# Altium PCB aboutlove.PcbDoc
Units mm, origin at the board's own origin, x right, y up, seen from the top; angles counter-clockwise.
Board outline 129.52 x 32.33 mm, 2 copper layers (Top Layer, Bottom Layer); 45 components, 100 nets, 325 pads, 150 vias.
Unrouted connection lines stored in the file: 1.
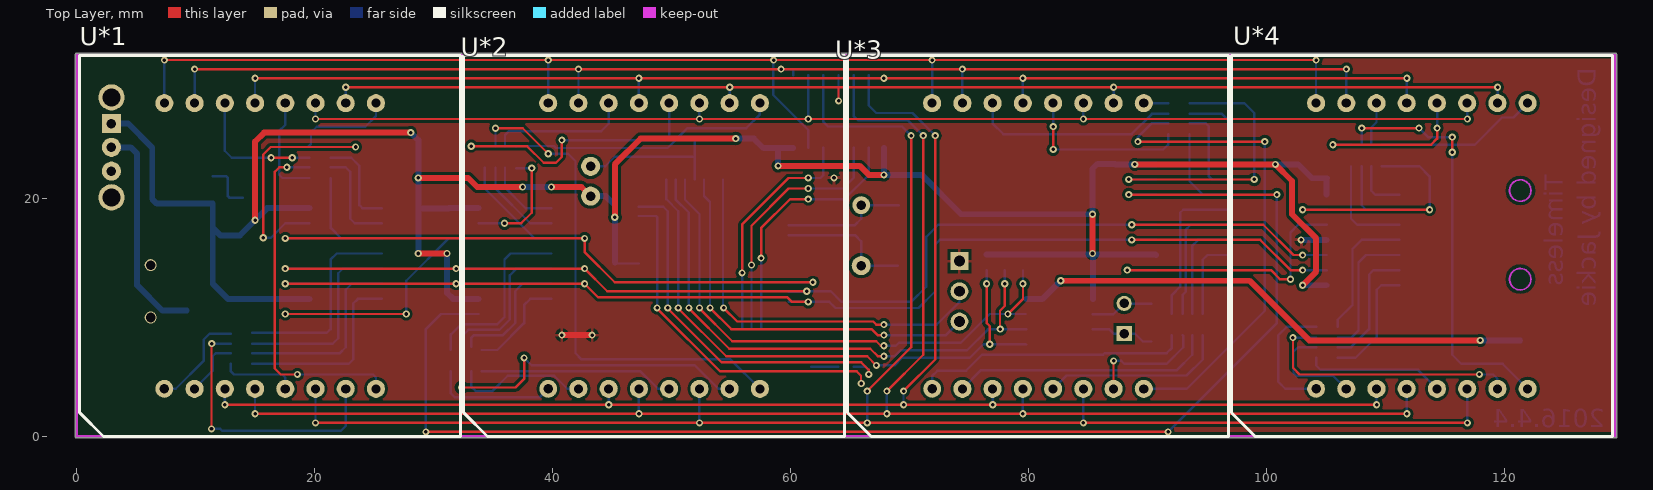
[diagram p0: Top Layer view]
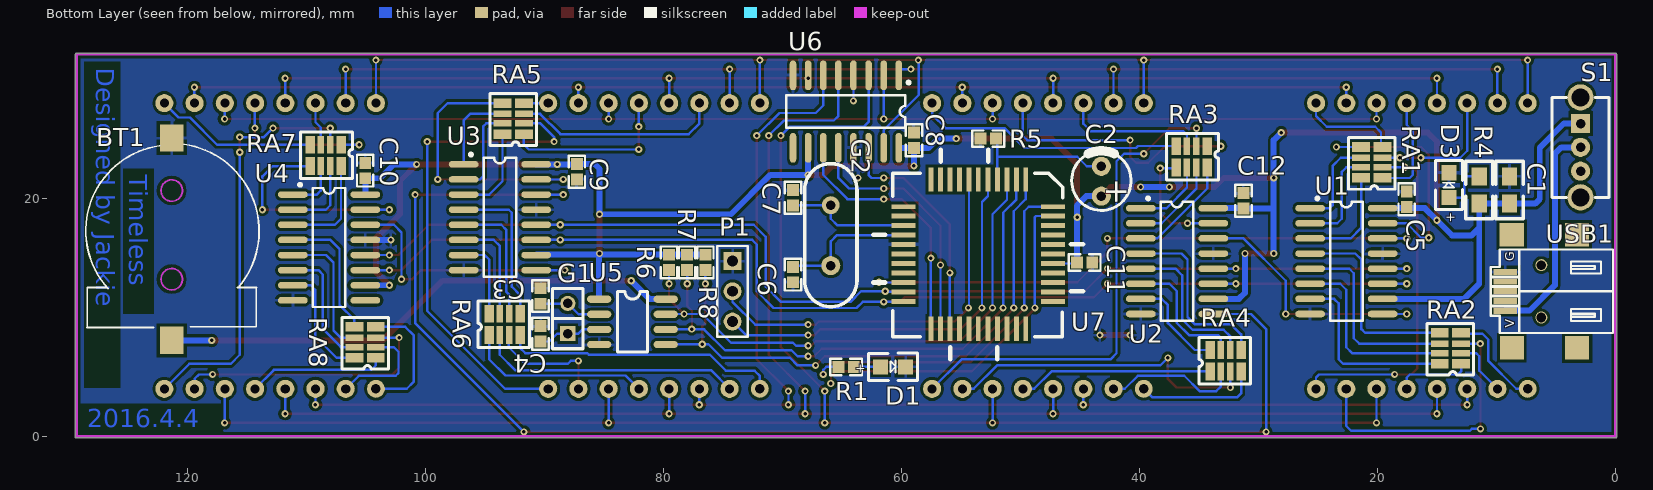
[diagram p1: Bottom Layer view, seen from below]

## Layer stack, top to bottom
Top Layer: signal copper 0.0356
Dielectric: dielectric 0.32, FR-4, Dk 4.8
Bottom Layer: signal copper 0.0356

## Board outline
-0.1,0.078 -0.1,32.1 cw(c0,32.1) 0,32.2 129.27,32.2 cw(c129.27,32.1) 129.37,32.1 129.37,0.078 cw(c129.27,0) 129.397,0 cw(c129.27,0) 129.27,-0.127 0,-0.127 cw(c0,0)

## Design rules (kind name [scope] priority, off if disabled: settings)
Clearance [All] p1: gap=0.254
PolygonConnect [All] p1: connectstyle=Relief reliefconductorwidth=0.254 reliefentries=4 polygonreliefangle="90 Angle"
RoutingVias [All] p1: holewidth=0.711 width=1.27 viastyle="Through Hole" minholewidth=0.711 minwidth=1.27 maxholewidth=0.711 maxwidth=1.27
SilkscreenOverComponentPads [All] p1: minsilkscreentomaskgap=0.254
SolderMaskExpansion [All] p1: expansion=0.102
Width [All] p1: maxlimit=1 minlimit=0.1 preferedwidth=0.2
27 further rules are at their usual default settings.

## Components (designator, comment, footprint, x,y, rotation, side; value= is the part's Value field where it differs from the comment)
BT1 "Battery" BAT-CR1220 121.285,13.208 r180 bottom
C1 "1uF" 0805 8.89,21.844 r270 bottom
C2 "10uF/16V" RB.1/.2A 43.18,20.193 r270 bottom
C3 "30pF" 0603_SMALL 90.297,12.446 r270 bottom
C4 "30pF" 0603_SMALL 90.297,9.271 r270 bottom
C5 "0.1uF" 0603_SMALL 17.526,20.574 r270 bottom
C6 "30pF" 0603_SMALL 69.088,12.954 r90 bottom
C7 "30pF" 0603_SMALL 69.088,20.701 r270 bottom
C8 "0.1uF" 0603_SMALL 58.928,25.527 r270 bottom
C9 "0.1uF" 0603_SMALL 87.249,21.59 r90 bottom
C10 "0.1uF" 0603_SMALL 105.029,22.987 r270 bottom
C11 "0.1uF" 0603_SMALL 43.942,14.605 r0 bottom
C12 "0.1uF" 0603_SMALL 31.242,20.447 r270 bottom
D1 "LED2" LED0805 61.722,5.842 r180 bottom
D3 "LED2" LED0805 13.97,20.066 r90 bottom
G1 "32768Hz" SIP2 88.011,8.636 r90 bottom
G2 "11.0592MHz" XTAL1_ARC 65.913,19.431 r270 bottom
P1 "Header 3" HDR1X3 74.168,14.732 r270 bottom
R1 "220R" 0603_SMALL 65.278,5.842 r180 bottom
R4 "10k" 0805 11.43,21.844 r270 bottom
R5 "10k" 0603_SMALL 53.34,25.019 r180 bottom
R6 "10k" 0603_SMALL 79.502,13.97 r90 bottom
R7 "10k" 0603_SMALL 77.978,13.97 r90 bottom
R8 "10k" 0603_SMALL 76.454,13.97 r90 bottom
RA1 "220R" NR4_L 19.558,21.717 r90 bottom
RA2 "220R" NR4_L 12.954,6.096 r90 bottom
RA3 "220R" NR4_L 34.29,24.384 r0 bottom
RA4 "220R" NR4_L 34.036,5.461 r180 bottom
RA5 "220R" NR4_L 91.694,25.4 r90 bottom
RA6 "220R" NR4_L 94.615,8.509 r180 bottom
RA7 "220R" NR4_L 107.061,24.511 r0 bottom
RA8 "220R" NR4_L 104.14,6.604 r90 bottom
S1 "SW1X3" SW1X3 2.921,26.289 r270 bottom
U1 "74HC595D" SOP16 22.606,14.732 r180 bottom
U2 "74HC595D" SOP16 36.83,14.732 r180 bottom
U3 "74HC595D" SOP16 93.726,18.415 r180 bottom
U4 "74HC595D" SOP16 108.077,15.875 r180 bottom
U5 "DS1302" SOP8 85.344,11.557 r180 bottom
U6 "74HC595D" SOP16 64.643,27.305 r270 bottom
U7 "STC12C5A16S2" TQFP44 49.53,21.59 r270 bottom
U*1 "点阵" 点阵 0.254,0 r0 top
U*2 "点阵" 点阵 32.508,0 r0 top
U*3 "点阵" 点阵 64.762,0 r0 top
U*4 "点阵" 点阵 97.016,0 r0 top
USB1 "USB" USB-MINI 5.08,12.192 r90 bottom

## Footprints (in the part's own frame and the unit in brackets; to place one, negate y for a bottom-side part, rotate by r counter-clockwise, add the part's x,y. Pads: shape width x height; smd on the part's side, far side on the other; paste and mask are expansions set on the pad)
0603_SMALL [mm]
  rect 1x1 smd: 1(0,0) 2(1.297,0)
  silkscreen extent -0.69,-0.69 1.99,0.69
0805 [mil]
  rect 60x50 smd: 1(0,0) 2(90,0)
  silkscreen extent -50,-45 140,45
BAT-CR1220 [mm]
  rect 2x2.3 smd: 1(0,-5.138) 2(0,11.862)
  Keep-Out Layer circle w0.15: c0,7.45 r0.9
  Keep-Out Layer circle w0.15: c0,0 r0.9
  silkscreen extent -7.22,-4.06 7.34,11.33
HDR1X3 [mm] "Connector; Header; 3 Position"
  rect 1.5x1.5 hole 0.9: 1(0,0)
  round 1.5 hole 0.9: 2(2.54,0) 3(5.08,0)
  silkscreen extent -1.27,-1.27 6.35,1.27
LED0805 [mm]
  rect 1.27x1.27 smd: 1(0,0) 2(2.09,0.005)
  silkscreen extent -1.01,-1.14 3.1,1.15
NR4_L [mm]
  rect 0.8x1.5 smd: 1(0,0) 4(2.6,0) 5(2.6,1.8) 8(0,1.8)
  rect 0.55x1.5 smd: 2(0.9,0) 3(1.7,0) 6(1.7,1.8) 7(0.9,1.8)
  silkscreen extent -0.95,-1.05 3.4,2.85
RB.1/.2A [mm]
  round 1.6 hole 0.8: 1(0,0) 2(-2.5,0)
  silkscreen extent -3.8,-2.5 1.2,2.5
SIP2 [mil]
  rect 50x50 hole 32: 1(0,0)
  round 50 hole 32: 2(100,0)
  silkscreen extent -50,-50 150,50
SOP8 [mil]
  oval 80x24 smd: 1(-1,-1) 2(-1,-51) 3(-1,-101) 4(-1,-151) 5(219,-151) 6(219,-101) 7(219,-51) 8(219,-1)
  silkscreen extent 59,-176 159,24
SOP16 [mm]
  oval 2.5x0.55 smd: 1(-3.035,4.445) 2(-3.035,3.175) 3(-3.035,1.905) 4(-3.035,0.635) 5(-3.035,-0.635) 6(-3.035,-1.905) 7(-3.035,-3.175) 8(-3.035,-4.445) 9(3.06,-4.445) 10(3.06,-3.175) 11(3.06,-1.905) 12(3.06,-0.635) 13(3.06,0.635) 14(3.06,1.905) 15(3.06,3.175) 16(3.06,4.445)
  silkscreen extent -2.55,-5 1.37,5.39
SW1X3 [mm]
  round 2.2 hole 1.5: 0(-2.2,0) 0(6.2,0)
  rect 1.6x1.6 hole 0.8: 1(0,0)
  round 1.6 hole 0.8: 2(2,0) 3(4,0)
  silkscreen extent -2.2,-2.4 6.2,2.4
TQFP44 [mil]
  rect 80x16 smd: 1(0,0) 2(0,-31) 3(0,-62) 4(0,-94) 5(0,-125) 6(0,-157) 7(0,-188) 8(0,-219) 9(0,-251) 10(0,-282) 11(0,-314) 23(494,-314) 24(494,-282) 25(494,-251) 26(494,-219) 27(494,-188) 28(494,-157) 29(494,-125) 30(494,-94) 31(494,-62) 32(494,-31) 33(494,0)
  rect 16x80 smd: 12(90,-404.32) 13(121,-404.32) 14(152,-404.32) 15(184,-404.32) 16(215,-404.32) 17(247,-404.32) 18(278,-404.32) 19(309,-404.32) 20(341,-404.32) 21(372,-404.32) 22(404,-404.32) 34(404,90.31) 35(372,90.31) 36(341,90.31) 37(309,90.31) 38(278,90.31) 39(247,90.32) 40(215,90.32) 41(184,90.32) 42(152,90.32) 43(121,90.32) 44(90,90.32)
  silkscreen extent -98,-504 594,189
USB-MINI [mm]
  rect 2x2 smd: 0(-4.746,-1.872) 0(-4.746,3.612)
  round 1 hole 0.8: 0(-2.2,1.128) 0(2.2,1.128)
  rect 2x2.032 smd: 0(4.746,-1.872) 0(4.746,3.628)
  rect 0.52x2 smd: 1(-1.626,4.166) 2(-0.813,4.166) 3(0,4.166) 4(0.813,4.166) 5(1.626,4.166)
  silkscreen extent -3.5,-4.87 3.5,5.38
XTAL1_ARC [mm]
  round 1.5 hole 0.8: 1(0,0)
  round 1.6 hole 0.8: 2(5.08,0)
  silkscreen extent -3.49,-2.2 8.53,2.2
点阵 [mil]
  round 59.06 hole 31.5: 1(279.92,157.48)
  round 60 hole 30: 2(379.92,157.48) 3(479.92,157.48) 4(579.92,157.48) 5(679.92,157.48) 6(779.92,157.48) 7(879.92,157.48) 8(979.92,157.48) 9(979.92,1102.36) 10(879.92,1102.36) 11(779.92,1102.36) 12(679.92,1102.36) 13(579.92,1102.36) 14(479.92,1102.36) 15(379.92,1102.36) 16(279.92,1102.36)
  silkscreen extent 0,0 1260,1260

## Part data
BT1: "Multicell Bat"
C1 C3 C4 C5 C6 C7 C8 C9 C10 C11 C12: library part Cap, "Capacitor"
C2: library part "Cap Pol2", "Polarized Capacitor (Axial)"
D1 D3: "Typical RED, GREEN, YELLOW, AMBER GaAs"
G1 G2: library part CRYSTAL, "Crystal"
P1: "Header, 3-Pin"
R1 R4 R5 R6 R7 R8: library part Res2, "Resistor"
RA1 RA2 RA3 RA4 RA5 RA6 RA7 RA8: library part NR4
U1 U2 U3 U4 U6: library part 74HC
U5: library part DS
U7: library part STC12C5A08S2
U*1 U*2 U*3 U*4: library part 点

## Via types
v1: diameter 0.6, hole 0.3, Top Layer to Bottom Layer, 150 vias

## Nets (pads, with @x,y where several pads share a name; then routed paths per layer and width w, separated by ;. In a path a pad name is that pad's centre, name@x,y a point inside that pad or via, vN(x,y) a via of type N, cw(c..) or ccw(c..) an arc to the next point about the centre after c; other vN are vias at no path point)
BAT: BT1.1 U5.8 | length 44.2
  Top Layer w0.5: v1(82.677,13.081) 98.546,13.081 103.557,8.07 v1(117.925,8.07)
  Bottom Layer w0.5: U5.8 81.128,11.532 v1(82.677,13.081) ; v1(117.925,8.07) BT1.1
GND: BT1.2 C1.1 C3.1 C4.1 C5.1 C6.1 C7.1 C8.1 C9.1 C10.1 C11.1 C12.1 D1.2 D3.2 P1.1 R5.1 U1.8 U1.13 U2.8 U2.13 U3.8 U3.13 U4.8 U4.13 U5.4 U6.8 U6.13 U7.16 USB1.5 | length 4.7
  Top Layer w0.5: v1(40.767,8.509) v1(43.307,8.509)
  Bottom Layer w0.5: v1(102.87,16.51) U4.13
  other v1: 63.627,21.717
NetC3_2: C3.2 G1.2 U5.2 | length 5.3
  Bottom Layer w0.2: U5.2 87.097,10.262 G1.2 88.038,11.149 C3.2
NetC4_2: C4.2 G1.1 U5.3 | length 5.3
  Bottom Layer w0.2: U5.3 86.766,8.992 87.122,8.636 G1.1 88.9,8.636 89.562,7.974 C4.2
NetD1_1: D1.1 R1.2 | length 2.3
  Bottom Layer w0.2: D1.1 R1.2
NetD3_1: D3.1 R4.1 | length 4.2
  Bottom Layer w0.2: R4.1 12.573,21.844 12.7,21.717 12.7,20.193 12.827,20.066 D3.1
NetP1_2: P1.2 U7.7 | length 32.9
  Top Layer w0.2: v1(54.356,10.795) 55.499,9.652 66.929,9.652 67.183,9.398 v1(67.818,9.398)
  Bottom Layer w0.2: v1@54.305,10.795 U7.7 ; v1(67.818,9.398) 72.263,9.398 74.168,11.303 P1.2
NetP1_3: P1.3 U7.5 | length 33.4
  Top Layer w0.2: v1(53.213,10.795) 54.991,9.017 66.783,9.017 67.291,8.509 v1(67.818,8.509)
  Bottom Layer w0.2: U7.5 52.705,20.193 53.213,19.685 v1(53.213,10.795) ; v1(67.818,8.509) 73.025,8.509 P1.3
NetRA1_1: RA1.1 U*1.12 | length 8.9
  Bottom Layer w0.2: U*1.12 17.524,26.164 17.01,25.65 17.01,21.979 17.272,21.717 RA1.1
NetRA1_2: RA1.2 U*1.8 | length 29.4
  Top Layer w0.2: v1(17.664,22.617) 17.029,22.617 16.637,22.225 16.637,5.715 17.145,5.207 v1(18.542,5.207)
  Bottom Layer w0.2: v1(17.664,22.617) RA1.2 ; v1(18.542,5.207) 24.892,5.207 25.144,4.955 U*1.8
NetRA1_3: RA1.3 U*1.14 | length 11.4
  Top Layer w0.2: v1(16.334,23.417) v1(18.112,23.417)
  Bottom Layer w0.2: U*1.14 12.444,24.005 13.032,23.417 v1(16.334,23.417) ; v1(18.112,23.417) RA1.3
NetRA1_4: RA1.4 U*1.9 | length 8.4
  Bottom Layer w0.2: RA1.4@19.431,24.317 19.685,24.571 19.685,25.527 20.174,26.016 24.238,26.016 25.144,26.922 U*1.9
NetRA1_5: RA1.5 U1.15 | length 21.5
  Top Layer w0.2: v1(15.68,16.696) 15.68,23.688 16.309,24.317 v1(23.435,24.317)
  Bottom Layer w0.2: v1(15.68,16.696) 16.315,16.696 17.526,17.907 U1.15 ; RA1.5 v1(23.435,24.317)
NetRA1_6: RA1.6 U1.1 | length 8
  Bottom Layer w0.2: RA1.6 23.065,23.417 23.749,22.733 23.749,19.431 24.003,19.177 U1.1
NetRA1_7: RA1.7 U1.2 | length 8.5
  Bottom Layer w0.2: RA1.7 22.595,22.617 22.987,22.225 22.987,18.288 23.368,17.907 U1.2
NetRA1_8: RA1.8 U1.3 | length 8.9
  Bottom Layer w0.2: RA1.8 21.358,17.504 22.225,16.637 U1.3
NetRA2_1: RA2.1 U*1.5 | length 6.4
  Bottom Layer w0.2: RA2.1 12.954,5.461 13.208,5.207 17.272,5.207 17.524,4.955 U*1.5
NetRA2_2: RA2.2 U*1.2 | length 5
  Bottom Layer w0.2: U*1.2 11.43,5.526 11.43,6.731 11.695,6.996 RA2.2
NetRA2_3: RA2.3 U*1.7 | length 23.4
  Top Layer w0.2: v1(11.328,0.635) 11.328,7.772 v1(11.352,7.796)
  Bottom Layer w0.2: v1(11.328,0.635) 12.065,0.635 12.219,0.481 22.198,0.481 22.604,0.887 U*1.7 ; v1(11.352,7.796) RA2.3
NetRA2_4: RA2.4 U*1.1 | length 8.6
  Bottom Layer w0.2: U*1.1 8.318,4 10.668,6.35 10.668,8.128 11.176,8.636 RA2.4@12.954,8.636
NetRA2_5: RA2.5 U1.4 | length 17.1
  Bottom Layer w0.2: RA2.5 21.015,8.696 21.336,9.017 21.336,14.859 21.844,15.367 U1.4
NetRA2_6: RA2.6 U1.5 | length 16.7
  Bottom Layer w0.2: RA2.6 21.512,7.796 21.971,8.255 21.971,13.716 22.352,14.097 U1.5
NetRA2_7: RA2.7 U1.6 | length 16.1
  Bottom Layer w0.2: RA2.7 22.109,6.996 22.606,7.493 22.606,12.319 23.114,12.827 U1.6
NetRA2_8: RA2.8 U1.7 | length 15.9
  Bottom Layer w0.2: RA2.8 22.86,6.096 23.241,6.477 23.241,11.176 23.622,11.557 U1.7
NetRA3_1: RA3.1 U*2.12 | length 21.7
  Top Layer w0.2: v1(33.147,24.384) 37.846,24.384 39.243,22.987 40.259,22.987 40.767,23.495 v1(40.767,24.892)
  Bottom Layer w0.2: v1(40.767,24.892) 49.403,24.892 49.778,25.267 U*2.12
NetRA3_2: RA3.2 U*2.8 | length 42.2
  Top Layer w0.2: v1(35.19,25.897) 37.476,25.897 v1(39.624,23.749)
  Bottom Layer w0.2: RA3.2 v1(35.19,25.897) ; v1(39.624,23.749) 41.275,23.749 41.91,23.114 41.91,6.985 42.418,6.477 54.921,6.477 U*2.8
NetRA3_3: RA3.3 U*2.14 | length 11.8
  Bottom Layer w0.2: RA3.3 35.99,25.322 36.322,25.654 44.069,25.654 44.698,26.283 U*2.14
NetRA3_4: RA3.4 U*2.9 | length 22.7
  Bottom Layer w0.2: RA3.4 36.909,24.403 40.113,24.403 40.278,24.238 49.657,24.238 51.327,25.908 56.261,25.908 57.398,27.045 U*2.9
NetRA3_5: RA3.5 U2.15 | length 9.9
  Top Layer w0.2: v1(35.941,17.907) 37.338,17.907 38.227,18.796 v1(38.227,22.543)
  Bottom Layer w0.2: U2.15 v1(35.941,17.907) ; RA3.5@36.931,22.543 v1(38.227,22.543)
NetRA3_6: RA3.6 U2.1 | length 6.3
  Bottom Layer w0.2: RA3.6 35.99,20.906 37.719,19.177 U2.1
NetRA3_7: RA3.7 U2.2 | length 7.6
  Bottom Layer w0.2: RA3.7 35.19,20.817 38.1,17.907 U2.2
NetRA3_8: RA3.8 U2.3 | length 9.1
  Bottom Layer w0.2: RA3.8 34.29,20.828 38.481,16.637 U2.3
NetRA4_1: RA4.1 U*2.5 | length 16.3
  Bottom Layer w0.2: RA4.1 47.371,5.461 48.832,4 U*2.5
NetRA4_2: RA4.2 U*2.2 | length 11.4
  Bottom Layer w0.2: RA4.2 33.136,4.202 33.528,3.81 34.925,3.81 36.219,5.104 40.108,5.104 41.212,4 U*2.2
NetRA4_3: RA4.3 U*2.7 | length 27
  Top Layer w0.2: v1(32.336,4.113) 36.879,4.113 37.592,4.826 v1(37.592,6.604)
  Bottom Layer w0.2: v1(32.336,4.113) RA4.3 ; v1(37.592,6.604) 38.227,5.969 51.943,5.969 53.912,4 U*2.7
NetRA4_4: RA4.4 U*2.1 | length 10.4
  Bottom Layer w0.2: RA4.4 31.436,3.616 31.75,3.302 38.92,3.302 U*2.1
NetRA4_5: RA4.5 U2.4 | length 15.4
  Bottom Layer w0.2: RA4.5 31.436,8.576 32.277,9.417 35.325,9.417 35.941,10.033 35.941,14.859 36.449,15.367 U2.4
NetRA4_6: RA4.6 U2.5 | length 13.2
  Bottom Layer w0.2: RA4.6 32.336,8.387 32.912,8.963 35.513,8.963 36.395,9.845 36.395,13.535 36.957,14.097 U2.5
NetRA4_7: RA4.7 U2.6 | length 10.9
  Bottom Layer w0.2: RA4.7@33.136,7.515 33.136,8.266 33.379,8.509 35.814,8.509 36.849,9.544 36.849,12.211 37.465,12.827 U2.6
NetRA4_8: RA4.8 U2.7 | length 8.5
  Bottom Layer w0.2: RA4.8 35.328,7.261 37.592,9.525 37.592,11.049 38.1,11.557 U2.7
NetRA5_1: RA5.1 U*3.12 | length 14.6
  Top Layer w0.2: v1(82.042,24.111) v1(82.042,26.035)
  Bottom Layer w0.2: U*3.12 82.042,27.99 v1(82.042,26.035) ; v1(82.042,24.111) 91.294,24.111 91.694,24.511 RA5.1
NetRA5_2: RA5.2 U*3.8 | length 41.2
  Top Layer w0.2: v1(89.154,24.765) v1(99.822,24.765)
  Bottom Layer w0.2: v1(89.154,24.765) 89.154,25.146 90.308,26.3 RA5.2 ; U*3.8 93.281,4 99.822,10.541 v1(99.822,24.765)
NetRA5_3: RA5.3 U*3.14 | length 17.5
  Bottom Layer w0.2: U*3.14 76.952,26.299 77.851,25.4 88.63,25.4 90.33,27.1 RA5.3
NetRA5_4: RA5.4 U*3.9 | length 2
  Bottom Layer w0.2: U*3.9 RA5.4
NetRA5_5: RA5.5 U3.15 | length 24.2
  Top Layer w0.2: v1(88.392,21.59) v1(98.933,21.59)
  Bottom Layer w0.2: v1(88.392,21.59) U3.15 ; RA5.5 98.111,28 98.933,27.178 v1(98.933,21.59)
NetRA5_6: RA5.6 U3.1 | length 7.2
  Bottom Layer w0.2: RA5.6 96.217,27.1 96.761,26.556 U3.1
NetRA5_7: RA5.7 U3.2 | length 7.7
  Bottom Layer w0.2: RA5.7 94.858,26.3 95.123,26.035 95.123,21.844 95.377,21.59 U3.2
NetRA5_8: RA5.8 U3.3 | length 7.7
  Bottom Layer w0.2: RA5.8 93.494,21.441 94.615,20.32 U3.3
NetRA6_1: RA6.1 U*3.5 | length 15.6
  Bottom Layer w0.2: U*3.5 83.148,5.116 93.254,5.116 94.615,6.477 RA6.1
NetRA6_2: RA6.2 U*3.2 | length 22.2
  Bottom Layer w0.2: U*3.2 75.982,5.57 92.438,5.57 93.726,6.858 93.726,8.498 RA6.2
NetRA6_3: RA6.3 U*3.7 | length 9.9
  Top Layer w0.2: U*3.7 v1@87.112,6.34
  Bottom Layer w0.2: v1(87.122,6.35) 87.757,6.35 88.011,6.096 91.567,6.096 92.964,7.493 92.964,8.46 RA6.3
NetRA6_4: RA6.4 U*3.1 | length 23.3
  Bottom Layer w0.2: U*3.1 71.872,5.07 72.317,5.515 74.73,5.515 76.073,6.858 86.233,6.858 86.379,7.004 91.586,7.004 92.015,7.433 RA6.4
NetRA6_5: RA6.5 U3.4 | length 12.9
  Bottom Layer w0.2: RA6.5 92.015,11.878 92.71,12.573 92.71,18.796 92.964,19.05 U3.4
NetRA6_6: RA6.6 U3.5 | length 10.9
  Bottom Layer w0.2: RA6.6 92.915,11.887 93.164,12.136 93.164,17.345 93.599,17.78 U3.5
NetRA6_7: RA6.7 U3.6 | length 8.9
  Bottom Layer w0.2: RA6.7 93.715,15.991 94.234,16.51 U3.6
NetRA6_8: RA6.8 U3.7 | length 6.9
  Bottom Layer w0.2: RA6.8 94.615,14.859 94.996,15.24 U3.7
NetRA7_1: RA7.1 U*4.12 | length 13.5
  Top Layer w0.2: v1(105.537,24.511) 113.792,24.511 114.3,25.019 v1(114.3,25.908)
  Bottom Layer w0.2: v1(105.537,24.511) RA7.1 ; U*4.12 114.3,27.986 v1(114.3,25.908)
NetRA7_2: RA7.2 U*4.8 | length 35.1
  Top Layer w0.2: v1(107.961,25.908) v1(112.776,25.908) ; v1(115.57,23.876) v1(115.57,25.146)
  Bottom Layer w0.2: RA7.2 v1(107.961,25.908) ; v1(112.776,25.908) 113.538,25.146 v1(115.57,25.146) ; v1(115.57,23.876) 115.57,6.858 116.332,6.096 119.81,6.096 U*4.8
NetRA7_3: RA7.3 U*4.14 | length 3.7
  Bottom Layer w0.2: RA7.3 108.761,25.957 109.206,26.402 U*4.14
NetRA7_4: RA7.4 U*4.9 | length 13.7
  Bottom Layer w0.2: RA7.4 117.475,24.511 119.761,26.797 120.703,26.797 U*4.9
NetRA7_5: RA7.5 U4.15 | length 19.8
  Top Layer w0.2: v1(102.997,19.05) v1(113.665,19.05)
  Bottom Layer w0.2: v1(102.997,19.05) U4.15 ; RA7.5 112.798,22.711 113.665,21.844 v1(113.665,19.05)
NetRA7_6: RA7.6 U4.1 | length 4.5
  Bottom Layer w0.2: RA7.6 108.761,20.652 109.093,20.32 U4.1
NetRA7_7: RA7.7 U4.2 | length 6.6
  Bottom Layer w0.2: RA7.7 107.961,19.42 108.331,19.05 U4.2
NetRA7_8: RA7.8 U4.3 | length 8.7
  Bottom Layer w0.2: RA7.8 107.061,18.288 107.569,17.78 U4.3
NetRA8_1: RA8.1 U*4.5 | length 11.6
  Bottom Layer w0.2: RA8.1 104.14,5.969 104.521,5.588 112.698,5.588 U*4.5
NetRA8_2: RA8.2 U*4.2 | length 8.8
  Bottom Layer w0.2: RA8.2 102.627,7.504 102.235,7.112 102.235,5.334 102.465,5.104 105.562,5.104 U*4.2
NetRA8_3: RA8.3 U*4.7 | length 22.9
  Top Layer w0.2: v1(102.186,8.304) 102.186,5.764 102.743,5.207 v1(117.856,5.207)
  Bottom Layer w0.2: v1(102.186,8.304) RA8.3 ; v1(117.856,5.207) 118.999,5.207 119.366,4.84 U*4.7
NetRA8_4: RA8.4 U*4.1 | length 10.8
  Bottom Layer w0.2: U*4.1 101.537,4 100.965,4.572 100.965,8.509 101.66,9.204 RA8.4
NetRA8_5: RA8.5 U4.4 | length 11.3
  Bottom Layer w0.2: RA8.5 105.94,9.801 107.188,11.049 107.188,15.748 107.95,16.51 U4.4
NetRA8_6: RA8.6 U4.5 | length 11.4
  Bottom Layer w0.2: RA8.6 107.11,8.304 107.696,8.89 107.696,14.605 108.331,15.24 U4.5
NetRA8_7: RA8.7 U4.6 | length 10.5
  Bottom Layer w0.2: RA8.7 107.072,7.504 108.585,9.017 108.585,13.589 108.966,13.97 U4.6
NetRA8_8: RA8.8 U4.7 | length 10
  Bottom Layer w0.2: RA8.8 107.442,6.604 109.22,8.382 109.22,12.319 109.601,12.7 U4.7
NetU6_1: U6.1 U*1.15 U*2.15 U*3.15 U*4.15 | length 109.7
  Top Layer w0.2: v1(9.906,30.861) v1(42.158,30.861) v1(59.182,30.861) v1(74.412,30.861) v1(106.68,30.861)
  Bottom Layer w0.2: U*1.15 v1@9.904,30.859 ; U*2.15 v1(42.158,30.861) ; v1(59.182,30.861) 60.198,30.861 U6.1 ; U*3.15 v1(74.412,30.861) ; U*4.15 v1@106.666,30.847
NetU6_2: U6.2 U*1.11 U*2.11 U*3.11 U*4.11 | length 105.7
  Top Layer w0.2: v1(20.066,26.67) v1(52.324,26.67) v1(61.468,26.67) v1(84.582,26.67) v1(116.84,26.67)
  Bottom Layer w0.2: v1@20.064,26.672 U*1.11 ; v1@52.318,26.676 U*2.11 ; v1(61.468,26.67) U6.2 ; v1@84.572,26.68 U*3.11 ; v1@116.826,26.684 U*4.11
NetU6_3: U6.3 U*1.6 U*2.6 U*3.6 U*4.6 | length 145.6
  Top Layer w0.2: v1(20.066,1.143) v1(52.324,1.143) v1(84.582,1.143) v1(116.84,1.143) ; v1(66.421,3.81) 70.104,7.493 v1(70.104,25.273)
  Bottom Layer w0.2: v1(20.066,1.143) U*1.6@20.066,3.998 ; v1@52.318,1.149 U*2.6 ; U6.3 62.738,26.416 63.119,26.035 69.342,26.035 v1(70.104,25.273) ; v1(66.421,1.143) v1(66.421,3.81) ; v1@84.572,1.153 U*3.6 ; v1@116.826,1.157 U*4.6
NetU6_4: U6.4 U*1.10 U*2.10 U*3.10 U*4.10 | length 105.4
  Top Layer w0.2: v1(22.606,29.337) v1(54.864,29.337) 64.008,29.337 ; v1(64.008,28.194) 64.008,29.337 ; v1(119.38,29.337) v1(87.122,29.337) 64.008,29.337
  Bottom Layer w0.2: U*1.10@22.606,28.002 v1(22.606,29.337) ; U*2.10 54.864,28.006 v1(54.864,29.337) ; v1(64.008,28.194) U6.4 ; U*3.10@87.122,28.01 v1(87.122,29.337) ; U*4.10@119.38,28.014 v1(119.38,29.337)
NetU6_5: U6.5 U*1.4 U*2.4 U*3.4 U*4.4 | length 139.7
  Top Layer w0.2: v1(14.986,1.905) v1(47.244,1.905) v1(79.502,1.905) v1(111.76,1.905) ; v1(68.072,3.81) 71.12,6.858 v1(71.12,25.273)
  Bottom Layer w0.2: v1@14.984,1.907 U*1.4 ; v1@47.238,1.911 U*2.4 ; U6.5 65.278,26.924 65.659,26.543 69.85,26.543 v1(71.12,25.273) ; v1(68.072,1.905) v1(68.072,3.81) ; v1@79.492,1.915 U*3.4 ; v1@111.746,1.919 U*4.4
NetU6_6: U6.6 U*1.3 U*2.3 U*3.3 U*4.3 | length 135
  Top Layer w0.2: v1(12.446,2.667) v1(44.704,2.667) v1(76.962,2.667) v1(109.22,2.667) ; v1(69.469,3.81) 72.136,6.477 v1(72.136,25.273)
  Bottom Layer w0.2: v1@12.444,2.669 U*1.3 ; v1@44.698,2.673 U*2.3 ; U6.6 66.548,27.813 67.183,27.178 70.231,27.178 v1(72.136,25.273) ; v1(69.469,2.667) v1(69.469,3.81) ; v1@76.952,2.677 U*3.3 ; v1@109.206,2.681 U*4.3
NetU6_7: U6.7 U*1.13 U*2.13 U*3.13 U*4.13 | length 105.1
  Top Layer w0.2: v1(14.986,30.099) v1(47.238,30.099) v1(79.502,30.099) v1(111.76,30.099)
  Bottom Layer w0.2: U*1.13@14.986,28.002 v1(14.986,30.099) ; U*2.13 v1(47.238,30.099) ; U*3.13 v1@79.492,30.089 ; U*4.13@111.76,28.014 v1(111.76,30.099)
  other v1: 67.818,30.099
NetU6_15: U6.15 U*1.16 U*2.16 U*3.16 U*4.16 | length 119.9
  Top Layer w0.2: v1(7.366,31.623) v1(39.618,31.623) v1(58.547,31.623) v1(71.872,31.623) v1(104.126,31.623)
  Bottom Layer w0.2: U*1.16 7.364,31.367 7.366,31.369 v1(7.366,31.623) ; U*2.16 v1(39.618,31.623) ; v1(58.547,31.623) 58.528,31.604 58.528,28.685 61.468,25.745 U6.15 ; U*3.16 v1(71.872,31.623) ; U*4.16 v1(104.126,31.623)
P13: U7.43 | length 29.3
  Top Layer w0.2: v1(48.768,10.795) 48.768,10.759 54.066,5.461 65.532,5.461 65.894,5.099 v1@65.894,4.464
  Bottom Layer w0.2: U7.43 48.666,18.517 48.768,18.415 v1(48.768,10.795)
  other v1: 65.913,4.445
P14: R1.1 U7.44 | length 31.9
  Top Layer w0.2: v1(49.657,10.795) 49.657,10.759 54.193,6.223 65.913,6.223 66.548,5.588 v1(66.548,5.207)
  Bottom Layer w0.2: U7.44 49.276,19.304 49.657,18.923 v1(49.657,10.795) ; R1.1 66.294,5.842 66.548,5.588 v1(66.548,5.207)
P15: R8.1 U5.5 U7.1 | length 49.5
  Top Layer w0.2: v1(50.546,10.795) 50.546,10.759 54.574,6.731 66.421,6.731 v1(67.183,5.969) ; v1(76.454,12.827) 76.454,9.525 76.708,9.271 v1(76.708,7.747)
  Bottom Layer w0.2: U7.1 49.53,19.939 50.546,18.923 v1(50.546,10.795) ; v1(67.183,5.969) 68.707,5.969 69.342,6.604 75.057,6.604 76.2,7.747 v1(76.708,7.747) 79.756,7.747 U5.5 ; v1(76.454,12.827) R8.1
P16: R7.1 U5.6 U7.2 | length 47.3
  Top Layer w0.2: v1(51.435,10.795) 51.435,10.759 54.828,7.366 66.675,7.366 67.31,6.731 v1(67.818,6.731) ; v1@77.578,9.036 77.578,10.558 77.978,10.958 v1(77.978,12.827)
  Bottom Layer w0.2: U7.2 50.317,19.914 51.435,18.796 v1(51.435,10.795) ; v1(67.818,6.731) 68.707,6.731 69.215,7.239 74.803,7.239 76.556,8.992 U5.6 ; v1(77.978,12.827) R7.1
  other v1: 77.597,9.017
P17: R6.1 U5.7 U7.3 | length 45.4
  Top Layer w0.2: v1(52.324,10.795) 52.324,10.759 55.082,8.001 67.171,8.001 67.552,7.62 v1(67.818,7.62) ; v1(78.232,10.287) 79.502,11.557 v1(79.502,12.827)
  Bottom Layer w0.2: U7.3 51.105,19.888 52.324,18.669 v1(52.324,10.795) ; v1(67.818,7.62) 68.834,7.62 69.088,7.874 74.295,7.874 76.708,10.287 U5.7@79.756,10.287 ; v1(79.502,12.827) R6.1
P22: U1.14 U7.20 | length 50.6
  Top Layer w0.2: v1(17.526,16.637) v1(42.672,16.637) 42.672,15.494 45.212,12.954 v1(61.849,12.954)
  Bottom Layer w0.2: v1(17.526,16.637) U1.14 ; U7.20 v1@61.824,12.929
P23: U1.12 U2.12 U3.12 U4.12 U7.21 | length 102.3
  Top Layer w0.2: v1(17.526,14.097) v1(31.877,14.097) v1(42.672,14.097) 44.577,12.192 v1(61.341,12.192) ; v1(88.646,17.78) 99.695,17.78 102.235,15.24 v1(102.997,15.24)
  Bottom Layer w0.2: v1(17.526,14.097) U1.12 ; v1(31.877,14.097) U2.12 ; U7.21 v1@61.29,12.141 ; v1(61.341,12.192) 63.373,12.192 64.262,11.303 70.104,11.303 71.374,12.573 71.374,16.764 72.39,17.78 v1(88.646,17.78) U3.12 ; v1(102.997,15.24) U4.12
P24: U1.11 U2.11 U3.11 U4.11 U7.22 | length 101.6
  Top Layer w0.2: v1(17.526,12.827) v1(31.877,12.827) v1(42.672,12.827) 43.815,11.684 59.715,11.684 60.096,11.303 v1(61.468,11.303) ; v1(88.646,16.51) 99.441,16.51 101.981,13.97 v1(102.997,13.97)
  Bottom Layer w0.2: v1(17.526,12.827) U1.11 ; v1(31.877,12.827) U2.11 ; U7.22 v1@61.443,11.328 ; v1(61.468,11.303) 63.232,11.303 63.74,10.795 70.739,10.795 72.136,12.192 72.136,16.129 72.517,16.51 v1(88.646,16.51) U3.11 ; v1(102.997,13.97) U4.11
P25: U6.11 U7.23 | length 21.6
  Top Layer w0.2: v1(57.506,14.986) 57.506,17.501 59.944,19.939 v1(61.468,19.939)
  Bottom Layer w0.2: U7.23 v1(57.506,14.986) ; v1(61.468,19.939) 64.516,19.939 66.548,21.971 U6.11
P26: U6.12 U7.24 | length 21.4
  Top Layer w0.2: v1(56.693,14.402) 56.693,17.704 59.817,20.828 v1(61.468,20.828)
  Bottom Layer w0.2: U7.24 v1(56.693,14.402) ; v1(61.468,20.828) 64.389,20.828 65.278,21.717 U6.12
P27: U6.14 U7.25 | length 19.6
  Top Layer w0.2: v1(55.905,13.741) 55.905,17.805 59.817,21.717 v1(61.468,21.717)
  Bottom Layer w0.2: U7.25 v1(55.905,13.741) ; v1(61.468,21.717) 62.484,21.717 62.738,21.971 U6.14
RESET: C2.2 R5.2 U7.4 | length 12.4
  Bottom Layer w0.2: C2.2 44.41,22.693 45.212,23.495 51.918,23.495 ; U7.4 51.918,23.495 ; R5.2@51.918,24.894 51.918,23.495
SER1: U1.9 U2.14 | length 22.5
  Top Layer w0.2: v1(17.526,10.287) v1(27.686,10.287)
  Bottom Layer w0.2: v1(17.526,10.287) U1.9 ; v1(27.686,10.287) 27.686,13.081 31.242,16.637 U2.14
SER2: U2.9 U3.14 | length 114.3
  Top Layer w0.2: v1(29.337,0.381) v1(91.694,0.381) ; v1(88.392,20.32) v1(100.838,20.32)
  Bottom Layer w0.2: v1@29.337,0.481 29.337,9.017 30.607,10.287 U2.9 ; v1(88.392,20.32) U3.14 ; v1(91.694,0.381) 100.838,9.525 v1(100.838,20.32)
SER3: U3.9 U4.14 | length 23.7
  Top Layer w0.2: v1(88.265,13.97) 100.33,13.97 101.092,13.208 v1(101.981,13.208)
  Bottom Layer w0.2: v1(88.265,13.97) U3.9 ; v1(101.981,13.208) 101.981,17.145 102.616,17.78 U4.14
SER4: U4.9
VCC: C1.2 C2.1 C5.2 C8.2 C9.2 C10.2 C11.2 C12.2 R4.2 R6.2 R7.2 R8.2 S1.1 U1.10 U1.16 U2.10 U2.16 U3.10 U3.16 U4.10 U4.16 U5.1 U6.10 U6.16 U7.38 | length 222
  Top Layer w0.5: v1(14.986,18.161) 14.986,24.765 15.748,25.527 v1(28.067,25.527) ; v1(28.702,15.367) v1(31.115,15.367) ; v1(28.702,21.717) 32.893,21.717 33.655,20.955 v1(37.465,20.955) ; v1(39.878,20.955) 42.418,20.955 C2.1 ; v1(45.212,18.415) 45.212,22.86 47.371,25.019 v1(55.372,25.019) ; v1(58.928,22.733) 65.786,22.733 66.548,21.971 v1(67.818,21.971) ; v1(85.344,15.367) v1(85.344,18.669) ; v1(88.9,22.86) v1(100.711,22.86) 102.108,21.463 102.108,18.669 104.14,16.637 104.14,13.843 v1(102.997,12.7)
  Bottom Layer w0.2: C11.2 45.315,14.529 U7.38
  Bottom Layer w0.5: S1.1 4.318,26.289 6.35,24.257 6.35,19.939 6.731,19.558 C1.2 R4.2 11.43,17.526 ; U1.10 12.7,11.557 11.43,12.827 11.43,17.526 ; U1.16 16.002,19.177 v1(14.986,18.161) 13.716,16.891 12.065,16.891 11.43,17.526 ; v1(28.067,25.527) 28.702,24.892 v1(28.702,21.717) 28.702,19.15 ; v1(28.702,15.367) 28.702,19.15 ; v1(31.115,15.367) 31.115,12.065 31.623,11.557 U2.10 ; C12.2 28.702,19.15 ; C12.2@31.269,19.177 U2.16 ; v1(37.465,20.955) v1(39.878,20.955) ; C2.1 44.45,20.193 45.239,19.404 C11.2 ; v1(55.372,25.019) 56.896,25.019 57.685,24.23 C8.2 v1(58.928,22.733) ; C8.2@58.943,24.245 U6.16 ; U6.10 v1(67.818,21.971) 70.993,21.971 74.295,18.669 v1(85.344,18.669) 85.344,22.479 85.752,22.887 C9.2 ; R8.2 R7.2 R6.2 90.639,15.267 U3.10 ; U5.1 v1@85.369,15.24 ; C9.2@87.276,22.86 v1(88.9,22.86) U3.16 ; v1(100.711,22.86) 102.616,22.86 103.786,21.69 C10.2 105.017,21.678 U4.16 ; v1(102.997,12.7) U4.10
VCC/5V: S1.2 USB1.1 | length 18.5
  Bottom Layer w0.5: S1.2 4.54,24.289 5.08,23.749 5.08,12.7 7.214,10.566 USB1.1
X1: C6.2 G2.2 U7.15 | length 11.4
  Bottom Layer w0.2: U7.15 65.38,16.916 65.913,16.383 G2.2 C6.2@68.988,14.351
X2: C7.2 G2.1 U7.14 | length 10.6
  Bottom Layer w0.2: U7.14 65.354,17.729 65.913,18.288 G2.1 C7.2@69.061,19.431
pads on no net: S1.0 S1.3 U6.9 U7.6 U7.8 U7.9 U7.10 U7.11 U7.12 U7.13 U7.17 U7.18 U7.19 U7.26 U7.27 U7.28 U7.29 U7.30 U7.31 U7.32 U7.33 U7.34 U7.35 U7.36 U7.37 U7.39 U7.40 U7.41 U7.42 USB1.0 USB1.2 USB1.3 USB1.4

## Polygon pours and split planes (outlines as drawn)
GND on Bottom Layer "Bottom Layer-No Net" (solid, remove dead copper, pour order 6): -2.413,-4.699 -1.778,-4.064 -1.778,40.386 129.794,40.386 133.35,36.83 131.064,34.544 131.064,-6.477
GND on Top Layer "Bottom Layer-No Net" (solid, remove dead copper, pour order 8): -2.54,-3.048 -2.54,34.671 -2.413,34.798 135.128,34.798 135.128,-2.413 132.461,-5.08

## Keep-outs
Keep-Out Layer:
  lines w0.2: 0,0 0,32.1 129.27,32.1 129.27,0
  lines w0.254: 0,0 129.27,0

## Other copper
Bottom Layer:
  text "Designed by Jackie" at 127.635,30.988 h1.52 r90
  text "Timeless" at 124.841,21.971 h1.52 r90
  text "2016.4.4" at 128.397,0.762 h1.52

## Text inside footprints (layer, text, board x,y; h text height)
C2: Bottom Overlay "+" at 42.78,21.693 h2 r90
D1: Bottom Overlay "+" at 62.967,5.359 h0.76
D3: Bottom Overlay "+" at 13.487,18.821 h0.76 r270
USB1: Bottom Overlay "G" at 8.509,14.707 h0.76 r270; Bottom Overlay "V" at 8.509,9.144 h0.76 r270